# Altium PCB system_warning_in_car.PcbDoc
Units mil, origin at the board's own origin, x right, y up, seen from the top; angles counter-clockwise.
Board outline 4090 x 3910 mil, 2 copper layers (Top Layer, Bottom Layer); 38 components, 54 nets, 192 pads, 92 vias.
Unrouted connection lines stored in the file: 1.
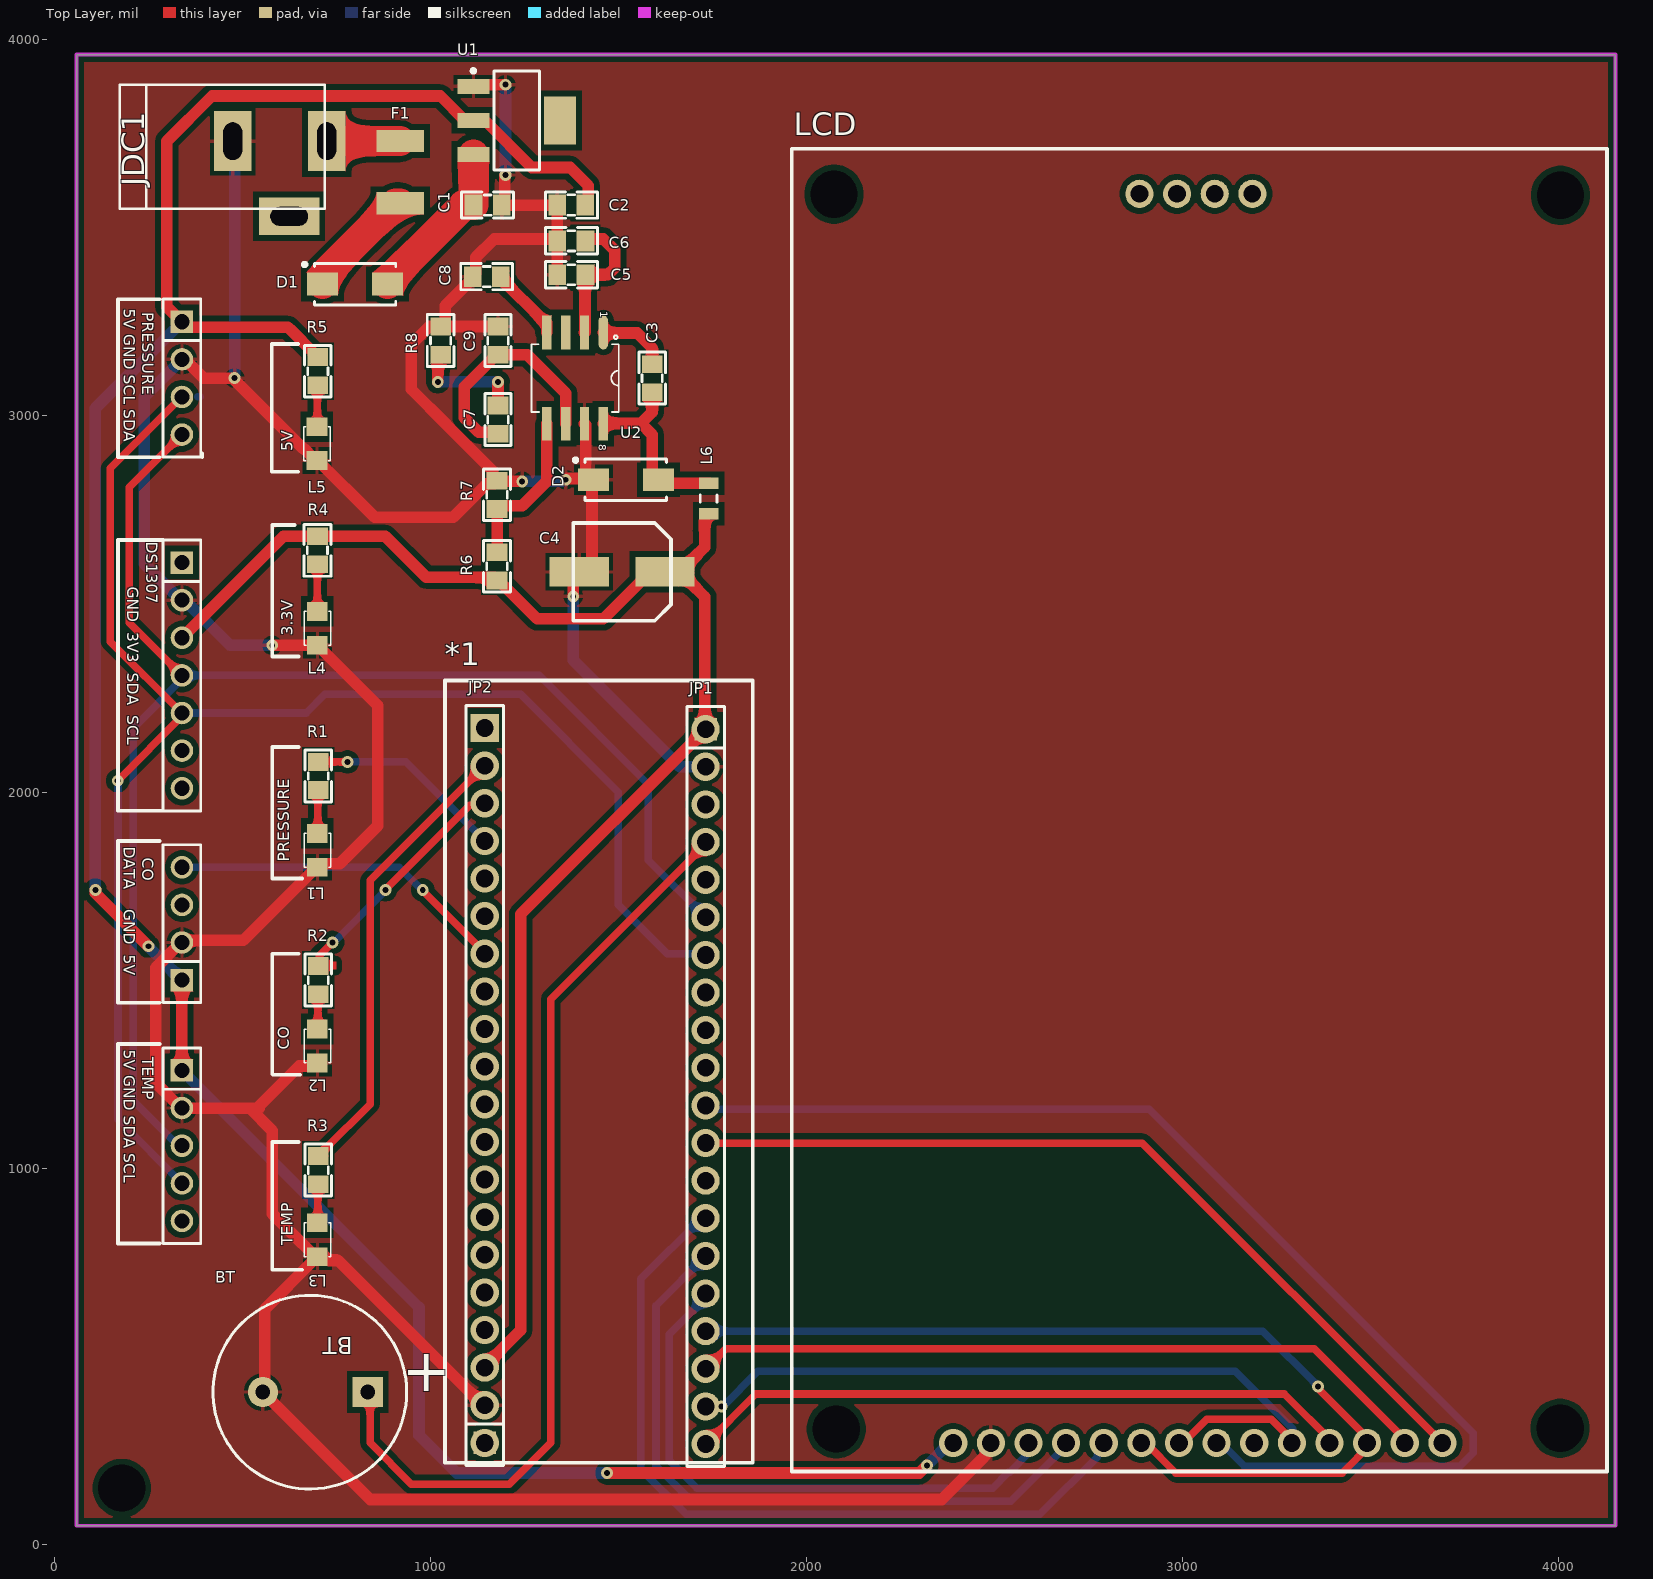
[diagram p0: Top Layer view]
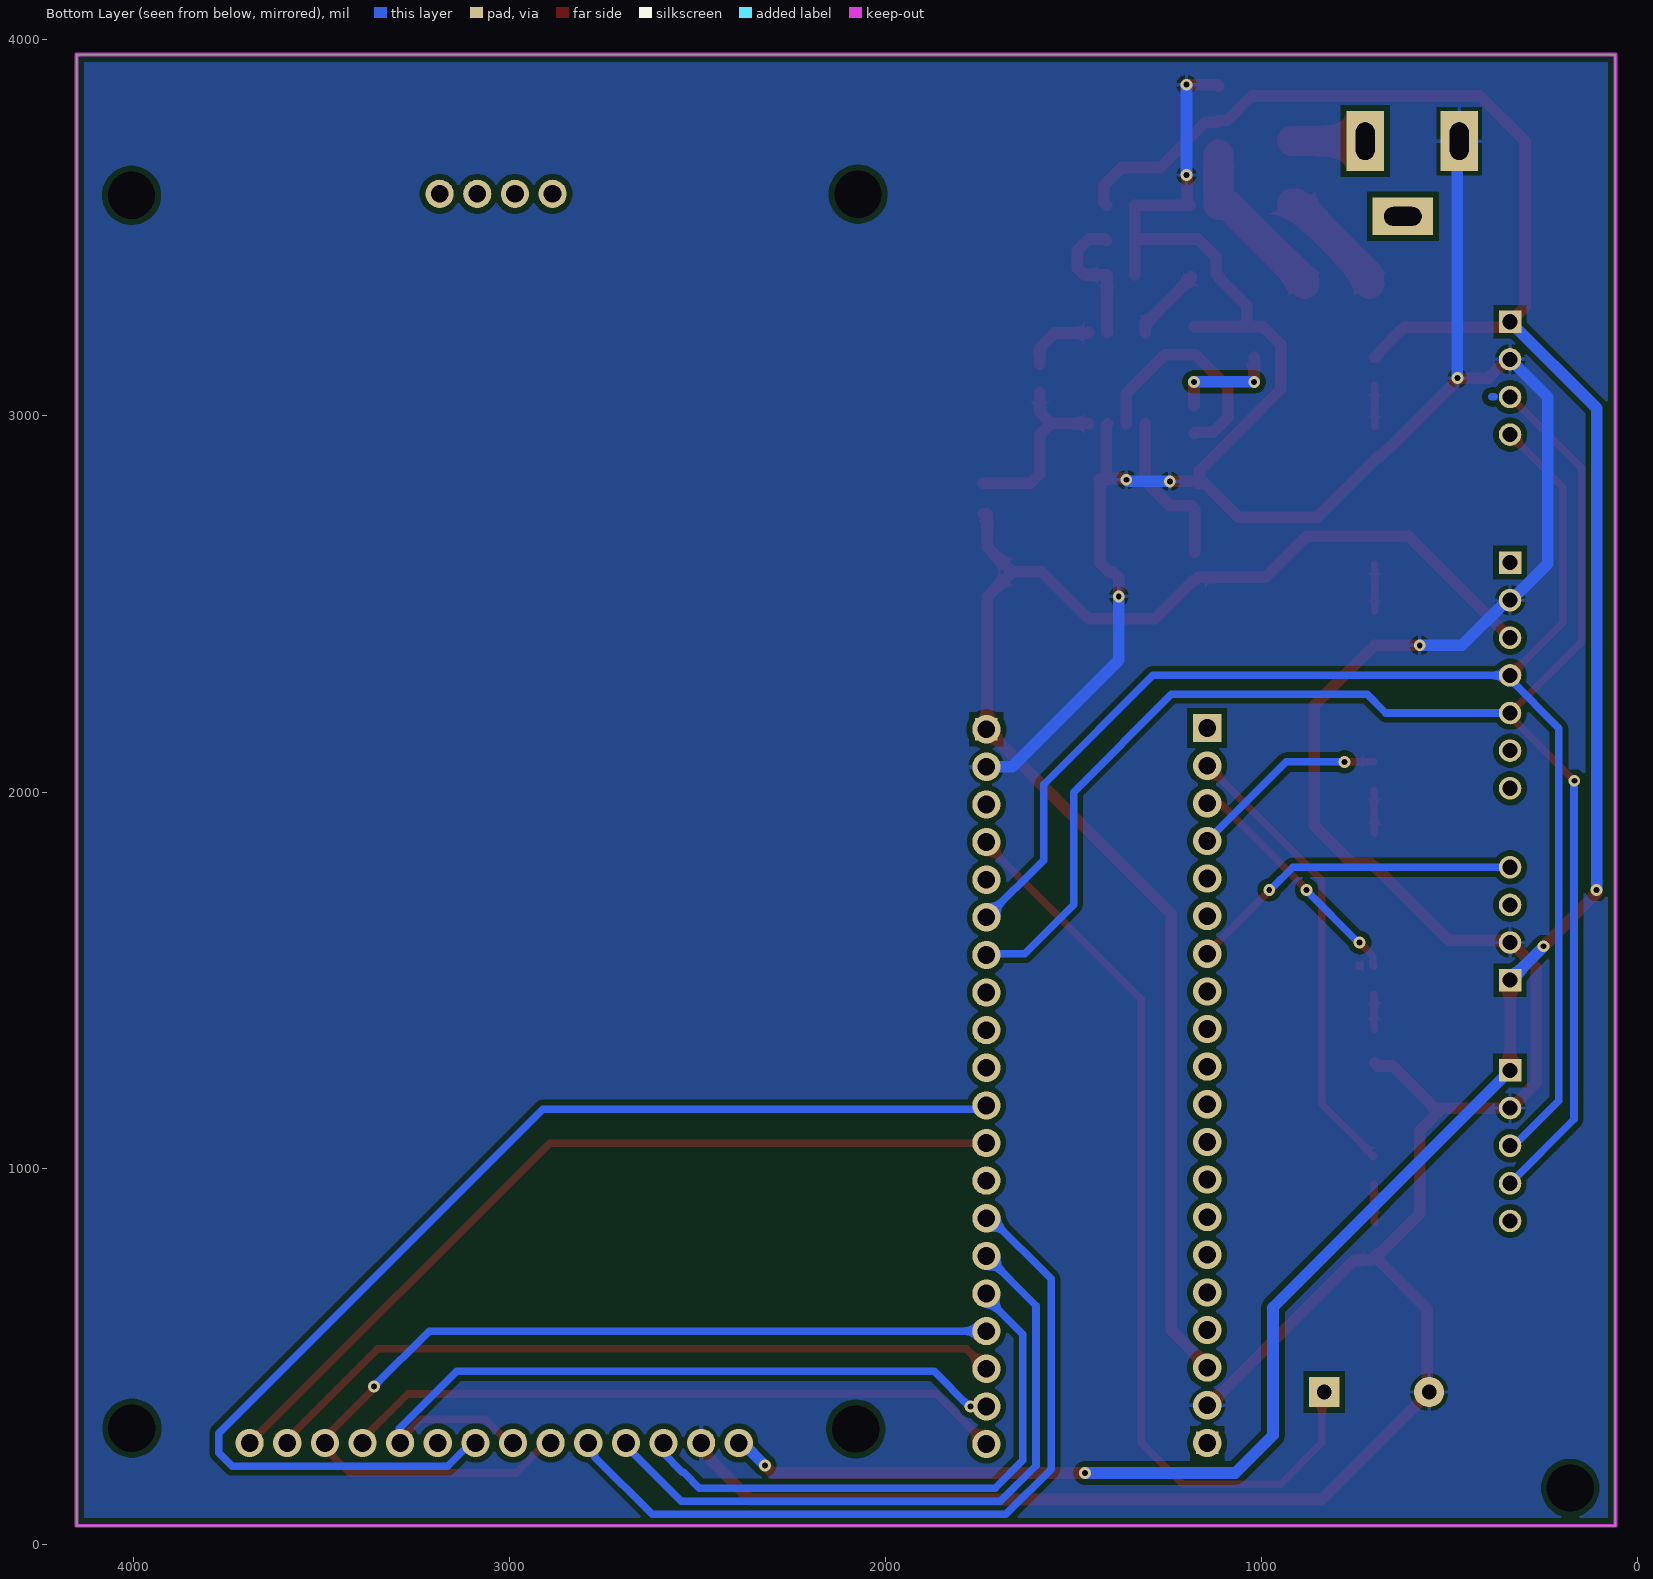
[diagram p1: Bottom Layer view, seen from below]
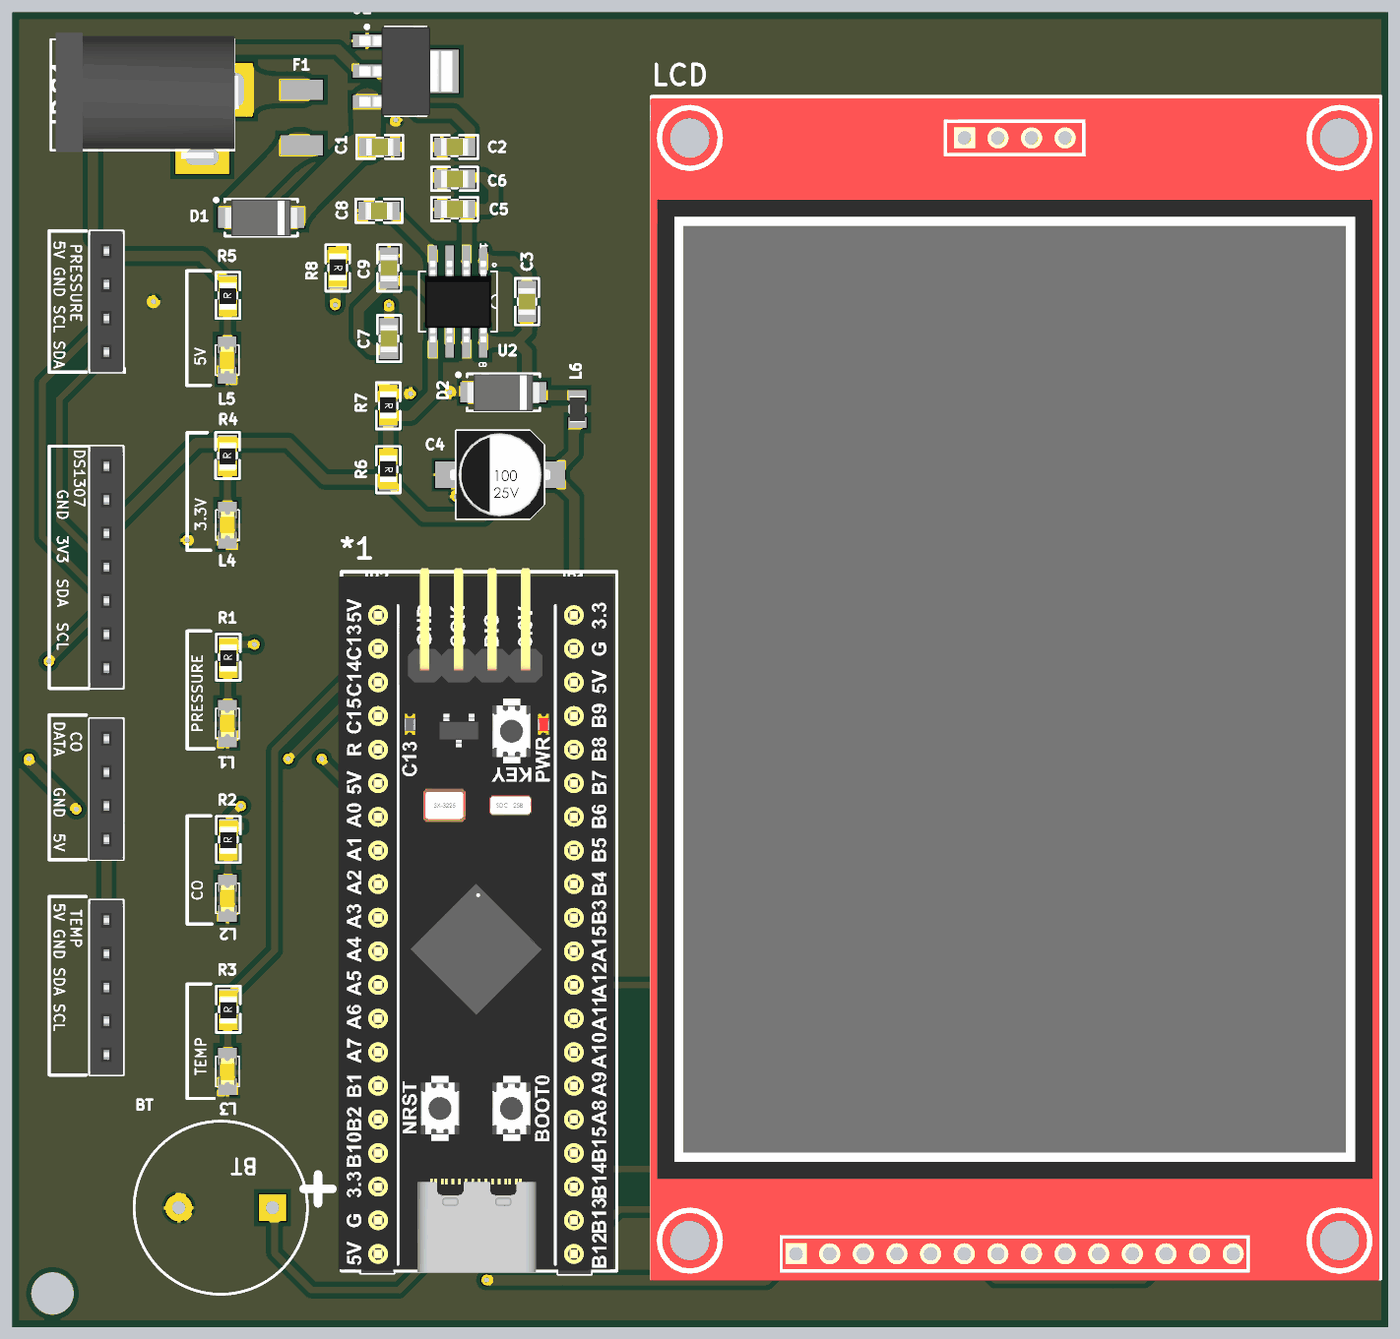
[diagram p2: 3D render of the assembled board from above, using the file's embedded part models]

## Layer stack, top to bottom
Top Solder: solder mask 0.4, Solder Resist, Dk 3.5
Top Layer: signal copper 1.4
Dielectric 1: dielectric 12.6, FR-4, Dk 4.8
Bottom Layer: signal copper 1.4
Bottom Solder: solder mask 0.4, Solder Resist, Dk 3.5

## Board outline
60,50 4150,50 4150,3960 60,3960

## Design rules (kind name [scope] priority, off if disabled: settings)
Clearance [All] p1: gap=15 ignorepadtopadclearanceinfootprint=FALSE
PolygonConnect [All] p1: connectstyle=Relief reliefconductorwidth=10 reliefentries=4 polygonreliefangle="90 Angle" airgapwidth=10
RoutingVias [All] p1: holewidth=15.75 width=31.5 viastyle="Through Hole" minholewidth=15.75 minwidth=31.5 maxholewidth=15.75 maxwidth=31.5
SolderMaskExpansion [All] p1: expansion=4 istentingtop=FALSE
Width [All] p1: maxlimit=30.8 minlimit=15 preferedwidth=20 minimp=50.000000 maximp=50.000000 favimp=50.000000
30 further rules are at their usual default settings.

## Classes and differential pairs
component class system_warning_in_car: JP1 L1 L2 L3 R1 R2 R3
component class "Power Suply": 30 C1 C2 C3 C4 C5 C6 C7 C8 C9 D1 D2 F1 JDC1 L4 L5 L6 R4 R5 R6 R7 R8 U1 U2

## Components (designator, comment, footprint, x,y, rotation, side; value= is the part's Value field where it differs from the comment)
*1 "blackpill" Blackpill 1441.5,1255.5 r180 top
BT "Buzzer" BUZZER 755,405 r180 top (schematic designator B*1)
C1 "10uF" "tu 0805" 1152.43,3560.13 r0 top
C2 "10uF" "tu 0805" 1375,3560 r180 top
C3 "100nF" "tu 0805" 1590,3100 r270 top
C4 "100uF" "tu nhom 6.3 (d)" 1510,2585 r180 top
C5 "10uF" "tu 0805" 1375,3375 r0 top
C6 "100nF" "tu 0805" 1375,3465 r0 top
C7 "1nF" "tu 0805" 1180,2990 r270 top
C8 "100nF" "tu 0805" 1150,3370 r0 top
C9 "47pF" "tu 0805" 1180,3200 r270 top
D1 "D Schottky" SS34 800,3350 r0 top
D2 "D Schottky" SS34 1520,2830 r0 top
F1 "MF-MSMF250/16" MF-MSMF250/16 920,3730 r270 top
JDC1 "Jack DC" DC-IN 600,3630 r0 top value="Jac DC"
JP1 "JP 1x20 2.54" "JP 1x20 CT" 1732,2167 r270 top
JP2 "JP 1x20 2.54" "JP 1x20 CT" 1145,270 r90 top
JP3 "DS1307" "JP 1x7 CT" 340,2610 r270 top
JP4 "TEMP" "JP 1x5 CT" 340,1260 r270 top
JP5 "PRESSURE" "JP 1x4 CT" 340,1500 r90 top
JP6 "PRESSURE" "JP 1x4 CT" 340,3250 r270 top
L1 "LED 0805" LED-0805-Yellow 700,1890 r270 top
L2 "LED 0805" LED-0805-Yellow 700,1370 r270 top
L3 "LED 0805" LED-0805-Yellow 700,855 r270 top
L4 "LED 0805" LED-0805-Yellow 700,2480 r270 top
L5 "LED 0805" LED-0805-Yellow 698.83,2970.97 r270 top
L6 "Inductor" I0805 1740,2780 r270 top value=10uH-1.28A
LCD "TFT 240x320" "TFT ILI" 3040,1930 r90 top (schematic designator *2)
R1 "1k" "tro smd 0805" 699.94,2042.43 r90 top
R2 "1k" "tro smd 0805" 699.94,1500 r90 top
R3 "1k" "tro smd 0805" 699.94,995 r90 top
R4 "1k" "tro smd 0805" 697.61,2642.43 r90 top
R5 "1k" "tro smd 0805" 698.77,3118.39 r90 top
R6 "10.2K" "tro smd 0805" 1180,2600 r270 top
R7 "3.3K" "tro smd 0805" 1180,2790 r270 top
R8 "3.3K" "tro smd 0805" 1030,3200 r270 top
U1 "AMS1117-5V" SOT230P700X180-4N 1229.84,3785 r0 top
U2 "TPS54231D" SOIC8_50_328_25X90_SMT 1385,3100 r270 top

## Footprints (in the part's own frame and the unit in brackets; to place one, negate y for a bottom-side part, rotate by r counter-clockwise, add the part's x,y. Pads: shape width x height; smd on the part's side, far side on the other; paste and mask are expansions set on the pad)
Blackpill [mm]
  rect 1.9x1.9 hole 1.2 mask+0.102: 1(7.531,-23.228)
  round 1.9 hole 1.2 mask+0.102: 2(7.531,-20.688) 3(7.531,-18.148) 4(7.531,-15.608) 5(7.531,-13.068) 6(7.531,-10.528) 7(7.531,-7.988) 8(7.531,-5.448) 9(7.531,-2.908) 10(7.531,-0.368) 11(7.531,2.172) 12(7.531,4.712) 13(7.531,7.252) 14(7.531,9.792) 15(7.531,12.332) 16(7.531,14.872) 17(7.531,17.412) 18(7.531,19.952) 19(7.531,22.492) 20(7.531,25.032) 21(-7.379,25.108) 22(-7.379,22.568) 23(-7.379,20.028) 24(-7.379,17.488) 25(-7.379,14.948) 26(-7.379,12.408) 27(-7.379,9.868) 28(-7.379,7.328) 29(-7.379,4.788) 30(-7.379,2.248) 31(-7.379,-0.292) 32(-7.379,-2.832) 33(-7.379,-5.372) 34(-7.379,-7.912) 35(-7.379,-10.452) 36(-7.379,-12.992) 37(-7.379,-15.532) 38(-7.379,-18.072) 39(-7.379,-20.612) 40(-7.379,-23.152)
  silkscreen extent -10.56,-26.44 10.22,26.37, body extent -10.31,-26.7 10.47,26.45, height 17.35
BUZZER [mil]
  rect 80x80 hole 36: 1(-78.73,0)
  round 80 hole 36: 2(200,0)
  silkscreen extent -182,-257 332,257
DC-IN [mil] "Jac DC input"
  rect 100x160 hole 50 slot 100 at 90 deg: 1(125,100) 2(-125,100)
  rect 160x100 hole 50 slot 100 at 0 deg: 3(25,-100)
  silkscreen extent -425,-80 120,250, body extent -410,-105 134,269, height 434
I0805 [mm] "Chip Inductor, 2-Leads, Body 2.00x1.20mm, IPC Medium Density"
  rect 0.8x1.34 smd: 1(-1.03,0) 2(1.03,0)
  silkscreen extent -0.25,-0.57 0.25,0.57, body extent -1,-0.6 1,0.6, height 0.45
"JP 1x4 CT" [mm]
  rect 1.52x1.52 hole 1.02: 1(0,0)
  round 1.52 hole 1.02: 2(2.54,0) 3(5.08,0) 4(7.62,0)
  silkscreen extent -1.52,-1.27 9.14,1.27, body extent -1.52,-1.25 9.14,1.25, height 8.51
"JP 1x5 CT" [mm]
  rect 1.52x1.52 hole 1.02: 1(0,0)
  round 1.52 hole 1.02: 2(2.54,0) 3(5.08,0) 4(7.62,0) 5(10.16,0)
  silkscreen extent -1.52,-1.27 11.68,1.27, body extent -1.52,-1.25 11.68,1.25, height 8.51
"JP 1x7 CT" [mm] "7 row, straight, gold plating"
  rect 1.52x1.52 hole 1.02: 1(0,0)
  round 1.52 hole 1.02: 2(2.54,0) 3(5.08,0) 4(7.62,0) 5(10.16,0) 6(12.7,0) 7(15.24,0)
  silkscreen extent -1.52,-1.27 16.76,1.27, body extent -1.52,-1.25 16.76,1.25, height 8.51
"JP 1x20 CT" [mm] "20 row, straight, gold plating"
  rect 1.52x1.52 hole 1.02: 1(0,0)
  round 1.52 hole 1.02: 2(2.54,0) 3(5.08,0) 4(7.62,0) 5(10.16,0) 6(12.7,0) 7(15.24,0) 8(17.78,0) 9(20.32,0) 10(22.86,0) 11(25.4,0) 12(27.94,0) 13(30.48,0) 14(33.02,0) 15(35.56,0) 16(38.1,0) 17(40.64,0) 18(43.18,0) 19(45.72,0) 20(48.26,0)
  silkscreen extent -1.52,-1.27 49.78,1.27, body extent -1.52,-1.25 49.78,1.25, height 8.51
LED-0805-Yellow [mil]
  rect 50x55 smd: 1(0,0) 2(90,0)
  silkscreen extent 0,-35 90,35, body extent 5,-25 85,25, height 43
MF-MSMF250/16 [mm]
  rect 1.5x3.2 smd: 1(0,0) 2(4.2,0)
SOIC8_50_328_25X90_SMT [mil] "SOIC"
  oval 90x25 smd mask+3: 1(-121.32,75)
  rect 90x25 smd mask+3: 2(-121.32,25) 3(-121.32,-25) 4(-121.32,-75) 5(121.32,-75) 6(121.32,-25) 7(121.32,25) 8(121.32,75)
  silkscreen extent -114,-116 90,116, body extent -121,-98 121,98, height 79
SOT230P700X180-4N [mm] "SOT223, 4-Leads, Body 6.50x7.00mm (avg), Pitch 2.30mm, IPC Medium Density"
  rect 2.15x1 smd: 1(-2.925,2.3) 2(-2.925,0) 3(-2.925,-2.3)
  rect 2.15x3.25 smd: 4(2.925,0)
  silkscreen extent -3.05,-3.35 1.55,3.47, body extent -3.5,-3.35 3.5,3.35, height 1.8
SS34 [mm] "DO-214-AC/SMA Molded Diode, Body 5.3x2.6mm, IPC Medium Density"
  rect 2.1x1.55 smd: 1(-2.2,0) 2(2.2,0)
  silkscreen extent -3.52,-1.4 2.75,1.45, body extent -2.75,-1.42 2.75,1.38, height 2.3
"TFT ILI" [mm]
  round 1.9 hole 1.2 mask+0.102: 1(-42.164,-16.51) 2(-42.164,-13.97) 3(-42.164,-11.43) 4(-42.164,-8.89) 5(-42.164,-6.35) 6(-42.164,-3.81) 7(-42.164,-1.27) 8(-42.164,1.27) 9(-42.164,3.81) 10(-42.164,6.35) 11(-42.164,8.89) 12(-42.164,11.43) 13(-42.164,13.97) 14(-42.164,16.51) 15(42.164,-3.683) 16(42.164,-1.143) 17(42.164,1.397) 18(42.164,3.937)
  round 2.057 hole 3.2: 21(-41.224,24.409) 21(-41.173,-24.46) 21(42.062,-24.486) 21(42.139,24.562)
  silkscreen extent -44.09,-27.62 45.21,27.42, body extent -44.22,-27.51 45.08,27.53, height 27.7
"tro smd 0805" [mm]
  rect 1.2x1.4 smd: 1(-0.946,-0.061) 2(0.954,-0.061)
  silkscreen extent -1.75,-0.97 1.75,0.84, body extent -1.56,-0.76 1.44,0.64, height 0.53
"tu 0805" [mm] "Compoment SMD 80x50mil"
  rect 1.2x1.4 smd: 1(-0.946,-0.003) 2(0.954,-0.003)
  silkscreen extent -1.75,-0.89 1.75,0.89, body extent -1.01,-0.64 1.01,0.63, height 0.61
"tu nhom 6.3 (d)" [mm]
  rect 4x2 smd: 1(-2.9,0) 2(2.9,0)
  silkscreen extent -3.3,-3.3 3.3,3.3, body extent -3.8,-3.3 3.8,3.3, height 8

## Part data
C1 C2: library part "Tu 0805 101 50V 20%", "Dán", Chung_Loai=Dán, Don_Vi=Con, Ma_Hang=MH002806, So_Chan=2, Ten_Linh_Kien="Tụ 0805 101-0.1nF 50V 20%"
C3 C5 C6 C7 C8 C9: library part "Tu 0805 106 16V 10%", "Dán", Chung_Loai=Dán, Don_Vi=Con, Ma_Hang=MH004553, So_Chan=2, Ten_Linh_Kien="Tụ 0805 106-10uF 10% 16V"
C4: library part "Tu Nhom 100uF 16V", "Dán", Chung_Loai=Dán, Don_Vi=Con, Ma_Hang=MH002219, So_Chan=2, Ten_Linh_Kien="Tụ Nhôm 100uF 16V 6.3x5.4MM"
D1 D2: "Schottky Diode", Code_JEDEC=DO-214-AA, LatestRevisionDate=17-Jul-2002, LatestRevisionNote="Re-released for DXP Platform.", PackageDescription="DO-214-AA/SMB; 2 C-Bend Leads; Body 5.3 x 3.6 mm, inc. leads (LxW)", PackageReference=SMB, Published=8-Jun-2000, Publisher="Altium Limited"
JDC1: "Jack DC input"
JP1 JP2: library part "JP 1x20 2.54 Cai Thang", "Cắm", Chung_Loai=Cắm, Don_Vi=Con, Ma_Hang=MH004006, Ten_Linh_Kien="Jump Đơn Cái 2.54MM 1x20P Thẳng"
JP3: library part "JP 1x7 2.54 Cai Thang", "Cắm", Chung_Loai=Cắm, Don_Vi=Con, Ma_Hang=MH004006, Ten_Linh_Kien="Jump Đơn Cái 2.54MM 1x20P Thẳng"
JP4: library part "JP 1x5 2.54 Cai Thang", "Cắm", Chung_Loai=Cắm, Don_Vi=Con, Ma_Hang=MH004006, Ten_Linh_Kien="Jump Đơn Cái 2.54MM 1x20P Thẳng"
JP5 JP6: library part "JP 1x4 2.54 Cai Thang", "Cắm", Chung_Loai=Cắm, Don_Vi=Con, Ma_Hang=MH004006, Ten_Linh_Kien="Jump Đơn Cái 2.54MM 1x20P Thẳng"
L1 L2 L3 L4 L5: library part "LED 0805 Vang", "Dán", Chung_Loai=Dán, Don_Vi=Con, Ma_Hang=MH002329, Ten_Linh_Kien="LED 0805 Màu Vàng ( Yellow)"
R1 R2 R3 R4 R5: library part "Tro 0805 1% 1k", "Dán", Chung_Loai=Dán, Don_Vi=Con, Ma_Hang=MH005468, So_Chan=2, Ten_Linh_Kien="Trở 0805 1% 1k"
R6 R7 R8: library part "Tro 0805 1% 5.1k", "Dán", Chung_Loai=Dán, Don_Vi=Con, Ma_Hang=MH008812, So_Chan=2, Ten_Linh_Kien="Trở 0805 1% 5.1k"
U2: library part IC_TPS54360DDAR, "Buck, Split Rail Switching Regulator IC Positive Adjustable 0.8V 1 Output 3.5A 8-PowerSOIC (0.154\", 3.90mm Width)", Alternate Part Number-1=NA, Case/Package=SOIC8, Manufacturer="Texas Instruments", Manufacturer Part Number=TPS54360DDAR, Supplier Part Number-1=C44377, Supplier-1=LCSC

## Free pads (board coordinates)
  round 80.99 hole 125.98: 5(180,150)

## Via types
v1: diameter 74.8, hole 47.24, Top Layer to Bottom Layer, 54 vias
v2: diameter 31.5, hole 15.75, Top Layer to Bottom Layer, 20 vias
v3: diameter 59.06, hole 39.37, Top Layer to Bottom Layer, 18 vias

## Nets (pads, with @x,y where several pads share a name; then routed paths per layer and width w, separated by ;. In a path a pad name is that pad's centre, name@x,y a point inside that pad or via, vN(x,y) a via of type N, cw(c..) or ccw(c..) an arc to the next point about the centre after c; other vN are vias at no path point)
3.3V: *1.18 *1.40 C4.1 JP1.1 JP2.3 JP3.3 L6.2 R4.2 R6.2 | length 4157.1
  Top Layer w30.8: v3(340,2410) 610,2680 880.02,2680 989.37,2570.65 1169.38,2570.65 R6.2 1181.54,2562.43 1283.97,2460 1459.8,2460 1584.8,2585 C4.1 C4.1@1663.54,2585 ; v1(1145,470) 1145,474.11 1240,569.11 1240,1675 v1(1732,2167) 1730,2169 1730,2518.54 C4.1@1663.54,2585 ; L6.2 1729.37,2739.45 1729.02,2739.1 1729.02,2650.48 C4.1@1663.54,2585
5V: C2.1 JP4.1 JP5.1 JP6.1 LCD.14 R5.2 U1.2 | length 7128.4
  Top Layer w30.8: v2(110,1740) 110.13,1739.87 110.13,1730.61 v2(250.75,1590) ; v3(340,1260) v3(340,1500) ; R5.2 697.23,3155.97 689.01,3164.19 689.01,3168.13 631.46,3225.67 621.65,3235.48 354.52,3235.48 300,3290 300,3730 420,3850 1027.05,3850 1092.05,3785 U1.2 1118.97,3780.71 1149.29,3780.71 1270,3660 1371.96,3660 1420,3611.96 1420,3567.91 C2.1 ; v2(1470,190) 2300,190 v2(2320,210)
  Bottom Layer w30.8: v2(110,1740) 110,3020 JP6.1 ; v2(250.75,1590) 250.88,1589.87 250.88,1589.12 v3(340,1500) ; v3(340,1260) 970,630 970,290 1070,190 v2(1470,190) ; v2(2320,210) 2320.19,210 2380.19,270 v1(2390,270)
+5: C5.2 C6.2 U2.2 | length 378.6
  Top Layer w30.8: U2.2 1411.29,3222.61 1411.29,3373.58 C5.2 1471.96,3374.87 1490,3392.91 1490,3440 1460,3470 1417.71,3470 C6.2
Buzzer: *1.37 BT.1 JP1.4 | length 2476.4
  Top Layer w20: v3(833.73,405) 840,398.73 840,270 950,160 1210,160 1320,270 1320,1449.58 1732,1861.58 v1(1732,1867)
DISPL_CS: *1.25 JP1.16 LCD.12 | length 1537
  Bottom Layer w20: v1(1732,667) 1732,655.25 1635,558.25 1635,223.99 1708.99,150 2495,150 2536.52,191.52 2540,191.52 2540,192.54 2592.15,244.68 2592.15,267.85 v1(2590,270)
DISPL_DC: *1.27 JP1.14 LCD.10 | length 2118.8
  Bottom Layer w20: v1(1732,867) 1721.22,867 1560,705.78 1560,200 1680,80 2620,80 2772.34,232.34 2772.34,237.51 2800,265.17 LCD.10@2800,270
  other v1: 2790,270
DISPL_MISO: *1.23 JP1.18 LCD.2 | length 1989.4
  Top Layer w20: v1(1732,467) 1785,520 1886.83,520 3350,520 3590,280 v1(3590,270)
DISPL_MOSI: *1.24 JP1.17 LCD.3 LCD.9 | length 2575.2
  Top Layer w20: v1(2890,270) 2901.75,270 2981.75,190 3423.45,190 3500,266.55 3500,274.83 3363.41,411.42 3363.41,416.59 v2(3360,420)
  Bottom Layer w20: v1(1732,567) 3213,567 v2(3360,420)
  other v1: 3490,270
DISPL_RST: *1.26 JP1.15 LCD.11 | length 1815.5
  Bottom Layer w20: v1(1732,767) 1600,635 1600,209.5 1694.5,115 2543.25,115 2698.25,270 LCD.11@2700,270
  other v1: 2690,270
DISPL_SCK: *1.22 JP1.19 LCD.5 LCD.8 | length 2057.7
  Top Layer w20: v1(1732,367) 1732.34,366.66 1773.34,366.66 v2(1773.69,366.31) ; v1(2990,270) 3001.75,270 3064.15,332.4 3235.85,332.4 3290,278.25 v1(3290,270)
  Bottom Layer w20: v2(1773.69,366.31) 1776.8,366.31 1870.48,460 3140,460 3219.76,380.24 3292.34,307.66 3292.34,272.34 v1(3290,270)
GND: *1.19 *1.39 BT.2 C1.2 C2.2 C4.2 C5.1 C6.1 C8.1 C9.1 D2.1 JDC1.2 JP1.2 JP2.2 JP3.2 JP4.2 JP5.2 JP6.2 L1.2 L2.2 L3.2 L4.2 L5.2 LCD.13 R7.1 R8.1 U1.1 U2.7 | length 11829.5
  Top Layer w30.8: JP6.2 347.86,3150 397.73,3100.13 479.87,3100.13 480.13,3099.87 480.13,3094.18 661.96,2912.35 664.96,2912.35 686.73,2890.57 691.73,2890.57 852.3,2730 1061.01,2730 1145.37,2814.36 1150.01,2819.01 1169.38,2819.01 R7.1 1179,2825.84 1244.16,2825.84 v2(1244.29,2825.71) ; 545.56,1160 520,1160 ; 545.56,1165.56 651.88,1271.88 691.88,1271.88 L2.2 ; BT.2@550,410 840.4,119.6 2359.6,119.6 2475.52,235.52 2475.52,243.61 2490,258.09 v1(2490,270) ; v3(555,405) 560,410 560,625.4 687.9,753.3 687.9,755.4 697.5,765 L3.2 ; v2(580,2390) L4.2 ; L3.2@698.75,766.25 690.4,774.6 685.4,774.6 660.4,799.6 659.91,799.6 580,879.51 580,1100 520,1160 ; L3.2@709.6,755.4 754.6,755.4 1140,370 v1(1145,370) ; L4.2@712.1,2377.9 860,2230 860,1910 759.6,1809.6 709.6,1809.6 L1.2 697.5,1800 503.06,1605.56 345.56,1605.56 v3(340,1600) 337.17,1600 270,1532.83 270,1227.17 337.17,1160 520,1160 ; U1.1 1118.97,3879.84 1199.65,3879.84 1199.81,3880 v2(1200,3880) ; R7.1@1165.45,2835.45 1165.45,2854.34 1044.2,2975.58 1044.2,2975.8 950,3070 950,3190 997.23,3237.23 R8.1 R8.1@1031.54,3237.23 ; C9.1 R8.1@1031.54,3237.23 ; C1.2 C1.2@1190.07,3560.07 ; v2(1200,3640) 1200,3639.81 1198.22,3638.03 1198.22,3568.22 C1.2@1190.07,3560.07 ; C5.1 C6.1 C6.1@1337.6,3465.04 ; v2(1360,2830) 1360.19,2830 1363.59,2833.4 D2.1@1410,2833.4 ; v2(1380,2520) 1380,2569.17 C4.2 1406.03,2585 1430,2608.97 1430,2826.61 D2.1 1410,2830 1412.9,2832.9 1412.9,2975.78 U2.7 ; R8.1@1031.54,3237.23 1039.77,3245.45 1039.77,3292.92 1112.77,3365.93 C8.1 1120.99,3378.09 1120.99,3420.99 1170,3470 1332.64,3470 C6.1@1337.6,3465.04 ; C1.2@1190.07,3560.07 C2.2 C2.2 1337.6,3559.96 C6.1@1337.6,3465.04
  Bottom Layer w20: *1.39@1721.51,2077.49 v1(1732,2067)
  Bottom Layer w30.8: JP6.2 240,3050 240,2607.17 337.17,2510 v3(340,2510) 347.86,2510 467.73,2390.13 579.87,2390.13 v2(580,2390) ; JDC1.2 480,3725 v2(480,3100) ; v2(1200,3640) v2(1200,3880) ; v2(1244.29,2825.71) 1244.43,2825.84 1355.65,2825.84 1359.81,2830 v2(1360,2830) ; v2(1380,2520) 1380.13,2519.87 1380.13,2349.87 1663,2067 v1(1732,2067)
  other v3: 340,1160
"LED TFT": *1.30 JP1.11 LCD.7 | length 3176.3
  Bottom Layer w20: v1(1732,1167) 1741.64,1157.36 2910.89,1157.36 3772.4,295.85 3772.4,244.15 3735.85,207.6 3164.15,207.6 3101.75,270 v1(3090,270)
LED_CO: *1.3 JP2.18 R2.2 | length 637.7
  Top Layer w20: R2.2 704.77,1540.01 704.77,1564.74 v2(740,1600) ; v2(880.75,1740) 910.15,1769.41 1105.5,1964.76 1139.76,1964.76 v1(1145,1970)
  Bottom Layer w20: v2(740,1600) 743.11,1600 880.75,1737.64 v2(880.75,1740)
LED_Pressure: *1.4 JP2.17 R1.2 | length 529.7
  Top Layer w20: R1.2 v2(780,2080)
  Bottom Layer w20: v2(780,2080) 935,2080 1017.35,1997.65 v1(1145,1870)
LED_Temp: *1.2 JP2.19 R3.2 | length 1223.1
  Top Layer w20: R3.2 706.27,1032.57 719.89,1046.2 719.89,1050.13 840,1170.24 840,1765 1070.29,1995.29 v1(1145,2070)
Net*1_1: *1.1 JP2.20
  other v1: 1145,2170
Net*1_5: *1.5 JP2.16
  other v1: 1145,1770
Net*1_6: *1.6 JP2.15
  other v1: 1145,1670
Net*1_8: *1.8 JP2.13
  other v1: 1145,1470
Net*1_9: *1.9 JP2.12
  other v1: 1145,1370
Net*1_10: *1.10 JP2.11
  other v1: 1145,1270
Net*1_11: *1.11 JP2.10
  other v1: 1145,1170
Net*1_12: *1.12 JP2.9
  other v1: 1145,1070
Net*1_13: *1.13 JP2.8
  other v1: 1145,970
Net*1_14: *1.14 JP2.7
  other v1: 1145,870
Net*1_15: *1.15 JP2.6
  other v1: 1145,770
Net*1_16: *1.16 JP2.5
  other v1: 1145,670
Net*1_17: *1.17 JP2.4
  other v1: 1145,570
Net*1_20: *1.20 JP2.1
  other v1: 1145,270
Net*1_28: *1.28 JP1.13
  other v1: 1732,967
Net*1_31: *1.31 JP1.10
  other v1: 1732,1267
Net*1_32: *1.32 JP1.9
  other v1: 1732,1367
Net*1_33: *1.33 JP1.8
  other v1: 1732,1467
Net*1_36: *1.36 JP1.5
  other v1: 1732,1767
Net*1_38: *1.38 JP1.3
  other v1: 1732,1967
NetC1_1: C1.1 D1.2 U1.3 | length 455
  Top Layer w80: D1.2 886.61,3358.15 1088.46,3560 C1.1 1115.2,3693.94 U1.3
NetC3_1: C3.1 U2.1 | length 189.9
  Top Layer w30.8: U2.1 1461.32,3220 1550,3220 1590,3180 1590,3137.36 C3.1
NetC3_2: C3.2 D2.2 L6.1 U2.8 | length 502.8
  Top Layer w30.8: U2.8 1461.32,2980 1560,2980 ; C3.2 1589.87,3009.87 1560,2980 ; L6.1 1739.65,2820.9 1615.71,2820.9 D2.2 1605.11,2830 1590,2845.11 1590,2950 1560,2980
NetC7_1: C7.1 R8.2 | length 287.8
  Top Layer w30.8: v2(1020,3090) 1020.13,3090.13 R8.2@1020.13,3154.95 ; C7.1 1179.93,3027.3 1179.93,3089.93 v2(1180,3090)
  Bottom Layer w30.8: v2(1020,3090) v2(1180,3090)
NetC7_2: C7.2 C9.2 U2.6 | length 618.6
  Top Layer w30.8: C7.2 1176.28,2956.02 1128.54,2956.02 1090,2994.56 1090,3076.5 1175.93,3162.43 1257.57,3162.43 1360,3060 U2.6
NetC8_2: C8.2 U2.4 | length 201.9
  Top Layer w30.8: C8.2 1187.57,3365.93 1302.58,3250.92 1307.1,3250.92 1310,3248.02 U2.4
NetD1_1: D1.1 F1.2 | length 307.6
  Top Layer w80: D1.1 714.72,3351.34 714.72,3371.89 907.48,3564.65 F1.2
NetL1_1: L1.1 R1.1 | length 116.2
  Top Layer w20: L1.1 701.17,1891.17 701.17,2004.03 R1.1
NetL2_1: L2.1 R2.1 | length 93.7
  Top Layer w20: L2.1 701.17,1371.17 701.17,1461.61 R2.1
NetL3_1: L3.1 R3.1 | length 103.7
  Top Layer w20: L3.1 701.17,856.17 701.17,956.61 R3.1
NetL4_1: L4.1 R4.1 | length 125.2
  Top Layer w20: L4.1 R4.1
NetL5_1: L5.1 R5.1 | length 111.2
  Top Layer w20: L5.1 700,2972.13 700,3080 R5.1
NetR6_1: R6.1 R7.2 U2.5 | length 430.7
  Top Layer w30.8: R6.1 R7.2 1185.83,2760.65 1244.5,2760.65 1310,2826.15 U2.5
SCL: *1.34 JP1.7 JP3.5 JP4.4 JP6.3 | length 4280.2
  Top Layer w20: v2(169.25,2030) 169.25,2030.58 340,2201.32 v3(340,2210) 150,2400 150,2860 JP6.3
  Bottom Layer w20: v2(169.25,2030) 170,2029.25 170,1130 v3(340,960) ; v3(340,2210) 670,2210 720,2260 1240,2260 1500,2000 1500,1700 1630,1570 1729,1570 v1(1732,1567) *1.34@1723,1567 ; 382.05,3050 388.94,3050
SDA: *1.35 JP1.6 JP3.4 JP4.3 JP6.4 | length 3930.8
  Top Layer w20: v3(340,2310) 200,2450 200,2810 JP6.4
  Bottom Layer w20: v3(340,1060) 330,1060 210,1180 210,2169.22 340,2299.22 v3(340,2310) 1290,2310 1580,2020 1580,1819 v1(1732,1667) 1732,1677.78 1715.64,1694.14 *1.35@1715.64,1695.38
SENSOR_CO: *1.7 JP2.14 JP5.4 | length 903.2
  Top Layer w20: v2(980,1740) 980,1737.5 1145,1572.5 v1(1145,1570)
  Bottom Layer w20: v3(340,1800) 916.89,1800 976.89,1740 v2(980,1740)
TOUCH_CS: *1.21 JP1.20 LCD.4 | length 1779.1
  Top Layer w20: *1.21@1730.5,268.5 v1(1732,267) 1865,400 3270,400 LCD.4@3400,270
  other v1: 3390,270
TOUCH_INT: *1.29 JP1.12 LCD.1 | length 2288.1
  Top Layer w20: v1(1732,1067) 2893,1067 v1(3690,270)
VCC: F1.1 JDC1.1 | length 195
  Top Layer w80: JDC1.1 F1.1
pads on no net: JDC1.3 JP3.1 JP3.6 JP3.7 JP4.5 JP5.3 LCD.6 LCD.15 LCD.16 LCD.17 LCD.18 LCD.21 U1.4 U2.3
copper on no net:
  other v1: 3190,270
  other v3: 340,860 340,1700 340,2010 340,2110 340,2610

## Polygon pours and split planes (outlines as drawn)
GND on Bottom Layer "GND_L02_P011" (solid, remove dead copper, pour order 11): 60,50 4150,50 4150,3960 60,3960
GND on Top Layer "GND_L01_P010" (solid, remove dead copper, pour order 10): 60,50 4150,50 4150,3960 60,3960

## Keep-outs
Keep-Out Layer:
  the board outline again, w10

## Silkscreen, mask and mechanical layers (free items; w line width, h text height)
Top Overlay:
  lines w10: 280,800 170,800 170,1330 280,1330 ; 280,1440 170,1440 170,1870 280,1870 ; 280,2890 170,2890 170,3310 280,3310 ; 290,1950 170,1950 170,2670 290,2670 ; 393.94,2890 393.94,2900 ; 640,2710 580,2710 580,2360 650,2360 ; 648.83,2850.97 578.83,2850.97 578.83,3180.97 578.83,3190.97 648.83,3190.97 ; 650,1070 580,1070 580,730 660,730 ; 650,1570 580,1570 580,1250 581.56,1248.44 653.49,1248.44 ; 650,2120 580,2120 580,1770 660,1770
  text "5V GND SCL SDA" at 185,3285 h30 r270
  text "PRESSURE" at 235,3275 h30 r270
  text "5V" at 633.83,2905.97 h30 r90
  text "DS1307" at 245,2665 h30 r270
  text "GND  3V3  SDA  SCL" at 195,2545 h30 r270
  text "3.3V" at 635,2415 h30 r90
  text "DATA    GND  5V" at 185,1855 h30 r270
  text "CO" at 235,1825 h30 r270
  text "PRESSURE" at 625,1815 h30 r90
  text "5V GND SDA SCL" at 185,1315 h30 r270
  text "CO" at 625,1315 h30 r90
  text "TEMP" at 235,1295 h30 r270
  text "TEMP" at 635,795 h30 r90

## Text inside footprints (layer, text, board x,y; h text height)
BT: Top Overlay "+" at 1055,505 h112.5 r180
U2: Top Overlay "1" at 1452,3278 h20 r270; Top Overlay "8" at 1448,2925 h20 r270